# EAGLE board 3x4 - FR1_v2 (EAGLE 9.0.1)

Size 108.6 x 83.2 mm. Coordinates in mm from the lower left corner, seen from the top.
Copper layers (1*16): Top 0.035mm / dielectric 1.5mm / Bottom 0.035mm
Design rules "default": minimum track width 6mil, minimum drill 0.35mm, track to track 6mil, track to pad 6mil, pad to pad 6mil, via to via 6mil, smd to smd 6mil, copper to edge 40mil, drill to drill 6mil, minimum pad ring 10mil, minimum via ring 8mil, stop-mask expansion 4mil, vias tented up to drill 0mil, thermal gap 10mil

## Footprints (pad centres in the part's own frame; a part is rotated, then mirrored left to right if it is on the bottom)
3X4_BOARD_FR1_V2 = hole 0.5: 3.5,3.5; 105.1,79.7

## Placement (x,y rotation side)
E$1  [3X4_BOARD_FR1_V2]  0,0 0 top

## Library data of the parts
E$1 = voltera_community_lib